# Altium PCB OpenAXES.PcbDoc (part 2 of 2)
Units mm, origin at the board's own origin, x right, y up, seen from the top; angles counter-clockwise.
Board outline 34.5 x 18 mm, 4 copper layers (L1, L2, L3, L4), stack 0.956 mm thick; 99 components, 71 nets, 369 pads, 165 vias.
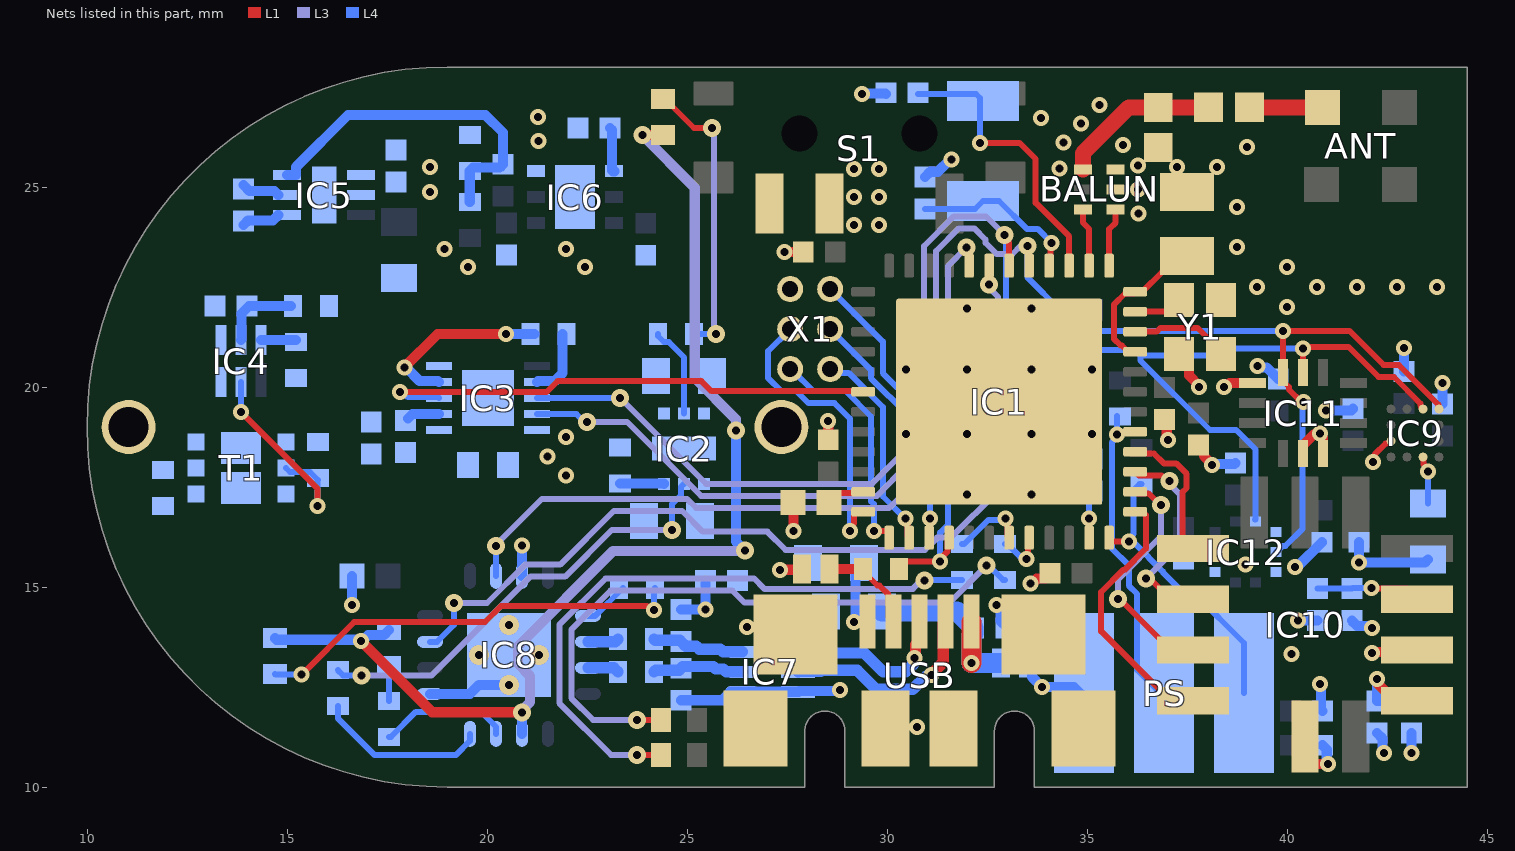
[diagram p4: the nets of this part, all layers, seen from the top]

## Via types
v1: diameter 0.4/0.45/0.4 (per signal layer), hole 0.2, L1 to L4, 143 vias
v2: diameter 0.5, hole 0.2, L1 to L4, 16 vias
v3: diameter 0.4/0.45/0.4 (per signal layer), hole 0.2, L1 to L4, tented both sides, 6 vias

## Nets (pads, with @x,y where several pads share a name; then routed paths per layer and width w, separated by ;. In a path a pad name is that pad's centre, name@x,y a point inside that pad or via, vN(x,y) a via of type N, cw(c..) or ccw(c..) an arc to the next point about the centre after c; other vN are vias at no path point) (continued)
+5V: C12.2 C25.2 C26.2 IC2.4 IC8.10 L2.2 LED3.ANODE LED4.ANODE LED5.ANODE | length 28.7
  L1 w0.254: v1(16.845,13.655) 18.631,11.869 v1(20.875,11.869) ; v1(23.885,26.301) LED3.ANODE@24.375,26.3
  L3 w0.254: v1(20.875,11.869) 20.875,11.922 21.077,12.124 21.077,12.772 20.773,13.076 20.773,13.522 23.155,15.904 26.444,15.904 v1(26.45,15.91) ; v1(23.885,26.301) 23.885,26.292 25.193,24.984 25.193,20.227 26.222,19.198 v1(26.222,18.912)
  L4 w0.254: LED5.ANODE@14.7,13.72 14.737,13.683 16.912,13.683 17.032,13.802 17.427,13.802 LED4.ANODE@17.55,13.925 ; IC8.10@20.875,11.328 v1(20.875,11.869) ; v1(26.222,18.912) 26.222,16.138 v1(26.45,15.91)
AI0_GPIO: IC1.36 PS.3 R23.1 | length 7.3
  L1 w0.15: IC1.36@35.554,16.232 35.554,16.185 35.599,16.14 v1(36.047,16.14)
  L4 w0.15: R23.1@36.366,17.574 36.316,17.574 36.166,17.424 36.166,16.327 36.047,16.208 v1(36.047,16.14) 36.095,16.092 36.189,16.092 36.895,15.386 36.895,15.372 37.443,14.823 37.702,14.823 38.925,13.6 PS.3@38.925,12.35
AI1_GPIO: IC1.41 PS.2 R24.1 | length 8.1
  L1 w0.15: v1(35.754,18.818) 35.787,18.85 36.172,18.85 IC1.41@36.204,18.882
  L4 w0.15: R24.1@35.754,19.271 v1(35.754,18.818) 35.754,18.75 35.622,18.618 35.622,15.964 36.045,15.541 36.045,15.034 36.25,14.829 36.25,12.925 PS.2@36.925,12.25
ALRT: IC1.18 IC3.8 | length 12.8
  L1 w0.15: v1(17.826,19.873) 21.487,19.873 21.765,20.151 25.359,20.151 25.61,19.9 29.387,19.9 IC1.18@29.404,19.882
  L4 w0.15: v1(17.826,19.873) 17.893,19.873 18.019,19.747 18.777,19.747 IC3.8@18.8,19.725
ANT: ANT.ANTENNA L1.2 | length 1.8
  L1 w0.399: L1.2@39.065,26.99 ANT.ANTENNA@40.885,26.99
BAT+: BAT.BAT+ C13.2 C14.2 IC2.3 IC3.10 R12.2 S1.2
  other v1: 29.175,24.05 29.8,24.05 29.175,24.75 29.8,24.75 29.175,25.45 29.8,25.45
BAT-: C12.1 C13.1 C14.1 C15.1 IC2.1 IC2.7 IC3.6 IC3.11 R7.1 R10.1 R11.1 R13.1 T1.1
BCD: IC2.5 R20.2 | length 11.2
  L3 w0.15: v1(16.86,12.79) 18.615,12.79 21.085,15.26 21.953,15.26 23.124,16.431 v1(24.625,16.431)
  L4 w0.15: R20.2@16.27,12.92 16.4,12.79 v1(16.86,12.79) ; v1(24.625,16.431) 24.625,17.073 24.85,17.299 24.85,17.502 IC2.5@24.925,17.577
D_N: C27.2 IC7.5 R19.1 | length 2.3
  L4 w0.284: R19.1@24.175,12.878 24.22,12.923 24.805,12.923 C27.2@24.85,12.968 24.896,13.014 25.654,13.014 25.72,12.949 25.911,12.949 25.977,12.883 26.377,12.883 IC7.5@26.38,12.88
D_P: C28.2 IC7.6 R21.1 | length 2.3
  L4 w0.284: R21.1@24.175,13.698 24.205,13.668 24.82,13.668 C28.2@24.85,13.638 24.968,13.52 25.231,13.52 25.303,13.449 25.834,13.449 25.9,13.383 26.377,13.383 IC7.6@26.38,13.38
GND: BALUN.5 BALUN.6 C1.1 C2.1 C3.1 C4.1 C5.1 C6.1 C7.1 C8.1 C9.1 C10.1 C11.1 C18.1 C19.1 C21.1 C22.1 C23.2 C24.1 C25.1 C26.1 C27.1 C28.1 C29.1 C30.2 C31.2 C32.1 C33.1 C34.2 C35.2 C36.1 C37.2 C38.1 C39.2 C40.1 C41.1 C42.1 C43.1 C44.1 D1.2 D2.2 IC1.49 IC3.5 IC5.4 IC5.7 IC6.3 IC6.7 IC7.3 IC7.4 IC8.3 IC8.13 IC8.17 IC9.11 IC10.6 IC10.9 IC11.1 IC11.6 IC11.7 IC12.3 IC12.5 IC12.8 IC12.9 PS.1 R10.2 R16.1 USB.5 USB.6 USB.7 USB.8 USB.9 USB.10 USB.11 X1.1 Y1.2 Y1.4 | length 34.9
  L1 w0.15: v1(42.15,18.125) 42.198,18.173 42.198,18.322 42.461,18.585 42.516,18.585 42.581,18.65 IC9.11@42.6,18.65
  L1 w0.254: v1(27.32,15.43) 27.86,15.43 D2.2@27.88,15.45 ; v1(27.44,23.375) C1.1@27.905,23.375 ; C10.1@27.65,17.11 27.66,17.1 v1(27.66,16.404) ; C2.1@28.53,18.682 v1(28.53,19.15) ; v1(33.584,15.089) 33.624,15.089 33.743,15.209 33.945,15.209 C3.1@34.078,15.342 ; C5.1@36.935,19.185 36.992,19.128 36.992,18.698 v1(37.02,18.67) ; Y1.2@37.3,20.825 37.548,20.577 37.548,20.291 37.8,20.04 v1(37.8,20) ; C4.1@37.79,18.55 37.923,18.417 37.923,18.272 38.13,18.065 v1(38.13,18.05) ; v1(38.425,20) 38.465,20 38.563,20.098 IC11.1@39.137,20.1 IC11.1@39.137,20.1 ; IC11.6@40.4,18.338 40.4,18.546 40.661,18.807 40.792,18.807 v1(40.82,18.835) 40.82,18.795 40.898,18.717 40.898,18.34 IC11.7@40.9,18.338 ; IC10.6@40.45,11.26 40.45,10.791 40.663,10.578 v1(41.022,10.578) ; v1(42.12,13.35) 42.148,13.378 43.203,13.378 IC10.9@43.25,13.425
  L4 w0.254: v1(16.625,14.55) C29.1@16.625,15.278 ; IC8.13@18.575,12.328 19.575,12.328 19.8,12.553 v2(20.55,12.553) ; IC8.3@20.875,15.278 v1@20.875,16.025 ; C27.1@24.85,12.168 25.881,12.168 26.093,12.38 IC7.3@27.78,12.38 27.803,12.403 28.797,12.403 v1(28.82,12.425) ; C28.1@24.85,14.438 v1(25.458,14.438) C26.1@25.458,15.16 ; v1(29.18,14.13) 29.208,14.158 29.208,15.333 C25.1@29.42,15.545 ; v1(29.375,27.325) 29.39,27.34 29.96,27.34 C8.1@29.975,27.325 ; C7.1@30.95,25.25 31.083,25.383 31.27,25.383 31.577,25.69 v1(31.617,25.69) ; v1(32.74,14.55) 32.74,14.51 32.833,14.417 32.833,14.158 C24.1@33.016,13.975 ; D1.2@33.53,13.103 33.628,13.005 33.628,12.747 v1(33.875,12.5) 34.675,12.5 PS.1@34.925,12.25 ; C6.1@35.054,18.2 35.092,18.237 35.092,18.791 v2(35.129,18.829) ; v1(38.13,18.05) 38.155,18.075 38.69,18.075 C43.1@38.715,18.1 ; v1(39.26,20.52) 39.288,20.492 39.488,20.492 C41.1@39.78,20.2 ; v1(40.2,15.5) 40.228,15.528 40.283,15.528 C39.2@40.875,16.12 ; v1(40.28,14.16) C35.2@40.765,14.16 ; v1(40.82,12.57) 40.848,12.542 40.848,11.94 C38.1@40.888,11.9 ; C37.2@40.888,11.045 40.994,10.938 40.994,10.606 v1(41.022,10.578) ; v1(40.979,19.417) 41.612,19.417 C42.1@41.65,19.455 ; C36.1@41.622,14.16 41.755,14.027 42.033,14.027 42.08,13.98 v1(42.12,13.98) ; C40.1@41.8,16.12 v1(41.8,15.61) 43.442,15.61 C32.1@43.522,15.69 ; C33.1@42.25,11.35 42.383,11.217 42.383,10.937 42.43,10.89 v1(42.43,10.85) ; C31.2@42.925,20.388 v1(42.925,20.975) ; v1(43.11,10.85) C34.2@43.11,11.35 ; C30.2@43.89,19.575 v1(43.89,20.1)
  other v1: 30.75,11.5 40.11,13.33 26.5,14 38.965,15.569 20.875,16.035 21.975,17.784 21.515,18.267 21.975,18.75 40,22 39.25,22.5 40.75,22.5 41.75,22.5 42.75,22.5 43.75,22.5 19.525,22.996 22.45,22.996 40,23 18.94,23.45 21.975,23.45 38.75,23.5 36.29,24.344 38.75,24.5 36.272,24.944 37.25,25.5 38.25,25.5 36.272,25.544 39,26 21.29,26.15 21.28,26.75
  other v2: 19.8,13.303 21.3,13.303 20.55,14.053 32.001,17.307 33.608,17.307 30.479,18.829 32.001,18.829 33.608,18.829 30.479,20.436 32.001,20.436 33.608,20.436 35.129,20.436 32.001,21.957 33.608,21.957
  other v3: 34.313,25.46 35.897,26.049 34.407,26.107 34.851,26.588 33.846,26.721 35.313,27.05
I2C_SCL: IC1.6 IC3.3 IC9.3 IC11.13 IC12.2 R2.1 | length 39.7
  L1 w0.15: v1(32.94,23.8) 32.94,23.732 33.054,23.618 IC1.6@33.054,23.032 ; IC11.13@40.4,20.363 v1(40.4,20.964) 40.436,21 41.543,21 42.293,20.25 42.674,20.25 43.335,19.589 43.335,19.534 43.4,19.469 IC9.3@43.4,19.45
  L3 w0.15: v1(23.326,19.726) 25.477,17.575 29.619,17.575 30.398,18.354 30.676,18.354 30.954,18.632 30.954,20.816 30.926,20.844 30.926,23.525 31.666,24.265 32.475,24.265 v1(32.94,23.8)
  L4 w0.15: IC3.3@21.25,19.725 v1@23.326,19.725 ; v1(32.94,23.8) 32.977,23.763 32.977,21.157 R2.1@32.94,21.12 32.94,21.07 33.09,20.92 36.205,20.92 36.335,20.79 ; IC12.2@39.2,16.688 39.215,16.688 39.215,18.438 38.728,18.925 38.074,18.925 36.335,20.664 36.335,20.79 ; v1(40.4,20.964) 38.406,20.964 38.232,20.79 36.335,20.79
I2C_SDA: IC1.5 IC3.4 IC9.4 IC11.14 IC12.4 R3.1 | length 38.4
  L1 w0.15: v1(33.518,23.528) 33.536,23.51 33.536,23.05 IC1.5@33.554,23.032 ; v1(40.418,19.63) 40.351,19.63 40.05,19.932 40.05,20 39.9,20.15 IC11.14@39.9,20.363 v1(39.9,21.4) 41.567,21.4 42.417,20.55 42.798,20.55 43.787,19.561 43.787,19.463 IC9.4@43.8,19.45
  L3 w0.15: v1(22.5,19.125) 23.503,19.125 25.353,17.275 29.744,17.275 30.522,18.054 30.8,18.054 31.254,18.508 31.254,20.94 31.226,20.968 31.226,23.401 31.79,23.965 32.184,23.965 32.463,23.685 32.463,23.605 32.743,23.325 33.137,23.325 33.34,23.528 v1(33.518,23.528)
  L4 w0.15: IC3.4@21.25,19.325 22.232,19.325 22.432,19.125 v1(22.5,19.125) ; v1(33.518,23.528) 33.518,22.732 34.325,21.925 34.325,21.825 34.75,21.4 v1(39.9,21.4) ; IC12.4@39.728,15.875 39.74,15.875 39.89,16.025 39.958,16.025 40.39,16.457 40.39,19.602 v1(40.418,19.63)
JTAG_TCKC: IC1.25 X1.3 | length 5.9
  L1 w0.15: v1(29.669,16.404) 30.009,16.404 30.054,16.359 IC1.25@30.054,16.232
  L4 w0.15: X1.3@27.58,20.422 27.635,20.422 28.157,19.9 28.964,19.9 29.6,19.264 29.6,17.139 29.669,17.07 v1@29.669,16.405 ; v1@29.668,16.404 v1@29.669,16.405
JTAG_TDI: IC1.27 X1.5 | length 6.3
  L1 w0.15: IC1.27@31.054,16.232 31.064,16.242 31.064,16.704 v1@31.061,16.707
  L4 w0.15: X1.5@28.59,21.422 28.608,21.422 29.596,20.434 29.596,20.224 30.515,19.304 30.676,19.304 31.074,18.905 31.074,16.72 v1@31.061,16.707
  other v1: 31.074,16.707
JTAG_TDO: IC1.26 X1.6 | length 5.2
  L1 w0.15: v1(30.456,16.707) 30.456,16.639 30.509,16.586 30.509,16.277 IC1.26@30.554,16.232
  L4 w0.15: X1.6@28.59,20.422 28.658,20.354 29.041,20.354 29.9,19.495 29.9,17.263 v1(30.456,16.707)
JTAG_TMSC: IC1.24 X1.2 | length 7.2
  L1 w0.15: 29.179,16.582 29.179,16.837 29.224,16.882 IC1.24@29.404,16.882
  L4 w0.15: X1.2@27.58,21.422 27.552,21.422 27.03,20.9 27.03,20.222 27.352,19.9 27.733,19.9 28.033,19.6 28.681,19.6 29.069,19.212 v1(29.069,16.404)
NetBAT_BAT-: BAT.BAT- C16.1 IC4.4 R14.1 T1.4
NetC7_2: C7.2 IC1.4 Y2.1 | length 4.3
  L1 w0.15: IC1.4@34.054,23.032 34.086,23.064 34.086,23.569 v1(34.118,23.601)
  L4 w0.15: C7.2@30.95,24.45 32.2,24.45 Y2.1@32.4,24.65 32.8,24.65 33.497,23.953 33.766,23.953 v1(34.118,23.601)
NetC8_2: C8.2 IC1.3 Y2.2 | length 7.3
  L1 w0.15: v1(32.325,26.1) 33.318,26.1 33.716,25.702 33.716,24.604 34.554,23.765 IC1.3@34.554,23.032
  L4 w0.15: C8.2@30.775,27.325 32.225,27.325 32.325,27.225 v1(32.325,26.1)
NetC10_2: C10.2 IC1.23 | length 1
  L1 w0.15: C10.2@28.55,17.11 28.785,17.345 29.367,17.345 IC1.23@29.404,17.382
NetC11_2: C11.2 IC1.45 IC1.48 | length 3.8
  L1 w0.15: IC1.45@36.204,20.882 36.024,20.882 35.869,21.037 35.841,21.037 35.679,21.199 35.679,22.066 35.951,22.337 36.159,22.337 IC1.48@36.204,22.382 36.384,22.382 36.877,22.875 37.1,22.875 C11.2@37.5,23.275
NetC15_2: C15.2 IC3.7 | length 0.8
  L4 w0.254: C15.2@18.025,19.212 18.137,19.325 IC3.7@18.8,19.325
NetC16_2: C16.2 IC4.5 R12.1 | length 2
  L4 w0.254: IC4.5@13.85,21.175 13.863,21.188 13.863,21.838 14.05,22.025 R12.1@15.1,22.025
NetC17_1: C17.1 IC5.3 R15.1 R16.2 | length 8.8
  L4 w0.254: IC5.3@15.005,25.3 15.226,25.3 15.228,25.302 15.228,25.505 16.525,26.802 19.96,26.802 20.4,26.362 C17.1@20.4,25.57 20.315,25.485 19.655,25.485 R16.2@19.57,25.4 R15.1@19.57,24.625
NetC19_2: C19.2 IC5.5 S1.3
  other v1: 18.575,24.875 18.575,25.5
NetC20_1: C20.1 IC5.2 | length 1
  L4 w0.254: C20.1@13.91,25.05 14.062,24.898 14.686,24.898 IC5.2@14.782,24.802
NetC20_2: C20.2 IC5.1 | length 1
  L4 w0.254: C20.2@13.91,24.05 14.027,24.167 14.651,24.167 IC5.1@14.782,24.298
NetC23_1: C23.1 IC6.4 | length 1.1
  L4 w0.254: C23.1@23.075,26.475 23.128,26.422 23.128,25.418 23.151,25.395 IC6.4@23.18,25.395
NetC32_2: C32.2 IC9.8 | length 1.2
  L1 w0.15: IC9.8@43.4,18.25 43.413,18.237 43.413,18.058 43.522,17.95 v1(43.522,17.882)
  L4 w0.15: C32.2@43.522,17.09 v1(43.522,17.882)
NetC33_2: C33.2 C34.1 IC10.8 | length 2.7
  L1 w0.254: v1(42.25,12.701) 42.278,12.673 42.278,12.567 42.765,12.08 IC10.8@43.25,12.08
  L4 w0.254: v1(42.25,12.701) C33.2@42.25,12.15 C34.1@43.11,12.15
NetC35_1: C35.1 C36.2 IC10.10 | length 2.6
  L1 w0.15: v1(42.11,14.97) 42.12,14.96 42.985,14.96 IC10.10@43.25,14.695
  L4 w0.15: C35.1@40.765,14.96 C36.2@41.622,14.96 41.632,14.97 v1(42.11,14.97)
NetD2_1: D2.1 R22.1 USB.4 | length 2.5
  L1 w0.15: R22.1@29.4,15.45 29.4,15.4 29.763,15.038 29.809,15.038 30.041,14.806 30.041,14.262 USB.4@30.166,14.138
  L1 w0.254: D2.1@28.56,15.45 R22.1@29.4,15.45
NetIC1_31: IC1.31 R6.1 | length 1.9
  L1 w0.15: v1(32.956,16.707) 32.956,16.64 33.009,16.586 33.009,16.277 IC1.31@33.054,16.232
  L4 w0.15: R6.1@31.88,16.075 31.93,16.075 32.531,16.676 32.926,16.676 v1(32.956,16.707)
NetIC1_32: IC1.32 R5.1 | length 1.2
  L1 w0.15: v1@33.489,15.706 33.519,15.735 33.519,16.197 IC1.32@33.554,16.232
  L4 w0.15: R5.1@32.955,16.075 33.005,16.075 33.326,15.754 33.442,15.754 v1@33.489,15.706
  other v1: 33.483,15.706
NetIC1_46: IC1.46 Y1.3 | length 2.5
  L1 w0.15: IC1.46@36.204,21.382 36.739,21.382 36.832,21.475 37.768,21.475 38.05,21.193 38.05,21.125 Y1.3@38.35,20.825
NetIC1_47: IC1.47 Y1.1 | length 1.2
  L1 w0.15: IC1.47@36.204,21.882 37.007,21.882 Y1.1@37.3,22.175
NetIC2_2: IC2.2 R8.2 | length 2.3
  L4 w0.15: R8.2@24.275,21.325 24.275,21.275 24.425,21.125 24.544,21.125 24.925,20.743 IC2.2@24.925,19.337
NetIC2_6: IC2.6 R7.2 | length 1.1
  L4 w0.254: R7.2@23.326,17.584 24.419,17.584 IC2.6@24.425,17.577
NetIC3_2: IC3.2 R9.1 | length 1.7
  L4 w0.254: IC3.2@21.25,20.125 21.273,20.148 21.69,20.148 21.891,20.349 R9.1@21.891,21.325
NetIC3_9: IC3.9 R9.2 | length 4.6
  L1 w0.254: v1(17.934,20.494) 18.765,21.325 v1(20.475,21.325)
  L4 w0.254: v1(17.934,20.494) 17.974,20.494 18.32,20.148 18.777,20.148 IC3.9@18.8,20.125 ; v1(20.475,21.325) R9.2@21.191,21.325
NetIC4_2: IC4.2 R13.2 T1.2 | length 5.5
  L1 w0.15: v1(13.853,19.371) 15.768,17.456 v1(15.768,17.026)
  L4 w0.15: IC4.2@13.85,20.125 IC4.2@13.85,20.125 13.852,19.372 v1(13.853,19.371) ; T1.2@14.975,17.975 15.075,17.875 15.575,17.875 15.775,17.675 15.768,17.668 v1(15.768,17.026)
NetIC4_3: IC4.3 R14.2 T1.5
NetIC4_6: IC4.6 R11.2 | length 0.9
  L4 w0.254: IC4.6@14.35,21.175 R11.2@15.225,21.175
NetIC8_5: IC8.5 R18.1 | length 1.2
  L4 w0.15: IC8.5@22.525,14.278 22.703,14.278 R18.1@23.4,14.975
NetIC8_11: IC8.11 R17.1 | length 3.3
  L4 w0.15: R17.1@17.55,11.256 17.6,11.256 18.222,11.878 19.85,11.878 20.225,11.503 IC8.11@20.225,11.328
NetIC8_12: IC8.12 R20.1 | length 4.3
  L4 w0.15: R20.1@16.27,12.02 16.27,11.718 17.182,10.806 19.228,10.806 19.575,11.153 IC8.12@19.575,11.328
NetLED1_CATHODE: LED1.CATHODE R5.2 | length 16.1
  L1 w0.15: v1(23.75,11.675) LED1.CATHODE@24.35,11.675
  L3 w0.15: v1(23.75,11.675) 22.655,11.675 22.11,12.22 22.11,13.933 23.09,14.913 26.134,14.913 26.437,14.61 31.561,14.61 v1(32.485,15.534)
  L4 w0.15: v1(32.485,15.534) 32.546,15.534 32.905,15.175 R5.2@32.955,15.175
NetLED2_CATHODE: LED2.CATHODE R6.2 | length 15.8
  L1 w0.15: v1(23.75,10.8) LED2.CATHODE@24.35,10.8
  L3 w0.15: v1(23.75,10.8) 23.106,10.8 21.81,12.096 21.81,14.057 22.966,15.213 26.677,15.213 26.935,14.955 30.646,14.955 30.86,15.169 v1(30.941,15.169)
  L4 w0.15: v1(30.941,15.169) 30.947,15.175 R6.2@31.88,15.175
NetLED3_CATHODE: LED3.CATHODE R8.1 | length 7.2
  L1 w0.15: LED3.CATHODE@24.45,27.2 25.175,26.475 v1(25.625,26.475)
  L3 w0.15: v1(25.625,26.475) 25.675,26.425 25.675,21.375 v1(25.725,21.325)
  L4 w0.15: R8.1@25.175,21.325 v1(25.725,21.325)
NetLED4_CATHODE: LED4.CATHODE R17.2 | length 0.9
  L4 w0.15: R17.2@17.55,12.156 LED4.CATHODE@17.55,13.025
NetLED5_CATHODE: LED5.CATHODE R18.2 | length 10.8
  L1 w0.15: v1(15.365,12.81) 16.68,14.125 19.95,14.125 20.353,14.528 24.004,14.528 24.102,14.43 v1(24.17,14.43)
  L4 w0.15: LED5.CATHODE@14.7,12.82 14.71,12.81 v1(15.365,12.81) ; v1(24.17,14.43) 24.17,14.945 R18.2@24.2,14.975
NetT1_3: T1.3 T1.6
R\E\S\E\T\: C6.2 IC1.35 R1.1 R4.1 X1.4 | length 10.8
  L1 w0.15: IC1.35@35.054,16.232 v1(35.054,16.707)
  L4 w0.15: X1.4@28.58,22.422 28.608,22.422 29.896,21.134 29.896,20.348 30.64,19.604 31.898,19.604 32.476,19.025 32.476,17.994 32.63,17.84 34.253,17.84 R1.1@34.293,17.8 ; R1.1@34.313,17.83 34.493,17.65 34.874,17.65 35.054,17.47 v1(35.054,16.707)
RF_N: BALUN.3 IC1.2 | length 1.5
  L1 w0.15: BALUN.3@34.894,24.444 34.9,24.438 34.9,24.11 35.054,23.95 IC1.2@35.054,23.032
RF_P: BALUN.4 IC1.1 | length 1.5
  L1 w0.15: IC1.1@35.554,23.032 35.554,23.95 35.714,24.11 BALUN.4@35.714,24.444
RXD: IC1.8 IC8.2 | length 20.2
  L1 w0.15: v1(31.987,23.49) 32.021,23.456 32.021,23.066 IC1.8@32.054,23.032
  L3 w0.15: v1(20.225,16.025) 20.225,16.057 21.374,17.206 24.998,17.206 25.229,16.975 30.052,16.975 30.831,17.754 31.598,17.754 32.476,18.632 32.476,20.632 31.526,21.582 31.526,23.029 v1(31.987,23.49)
  L4 w0.15: IC8.2@20.225,15.278 v1(20.225,16.025)
SPI_C\S\: IC1.40 IC10.1 | length 3.6
  L1 w0.15: IC1.40@36.204,18.382 36.249,18.337 36.672,18.337 36.919,18.09 37.231,18.09 37.493,17.827 37.493,17.475 37.385,17.367 37.385,16.155 IC10.1@37.65,15.89
SPI_MISO: IC1.37 IC10.4 | length 6.7
  L1 w0.15: IC1.37@36.204,16.882 36.384,16.882 36.472,16.795 36.472,15.964 35.928,15.42 35.897,15.42 35.353,14.876 35.353,13.892 37.165,12.08 IC10.4@37.65,12.08
SPI_MOSI: IC1.38 IC10.3 | length 6
  L1 w0.15: v1(35.778,14.7) 35.815,14.7 37.165,13.35 IC10.3@37.65,13.35 ; IC1.38@36.204,17.382 36.249,17.337 36.54,17.337 36.826,17.051 v1(36.855,17.051)
  L3 w0.15: v1(35.778,14.7) 35.778,15.199 36.855,16.276 v1(36.855,17.051)
SPI_SCLK: IC1.39 IC10.2 | length 5.3
  L1 w0.15: IC1.39@36.204,17.882 36.297,17.79 36.862,17.79 37.001,17.651 v1(37.068,17.651) ; v1(36.47,15.21) 36.518,15.162 36.623,15.162 37.165,14.62 IC10.2@37.65,14.62
  L3 w0.15: v1(36.47,15.21) 37.33,16.07 37.33,17.308 37.068,17.57 v1(37.068,17.651)
TXD: IC1.7 IC8.15 | length 22.6
  L1 w0.15: v1(32.552,22.557) v1(32.552,22.557) 32.553,23.031 IC1.7@32.554,23.032
  L3 w0.15: v1(19.175,14.6) 20.001,14.6 20.961,15.56 21.829,15.56 23.175,16.906 24.873,16.906 25.394,16.385 27.007,16.385 27.463,15.929 30.948,15.929 31.251,16.232 31.597,16.232 32.776,17.41 32.776,22.252 32.552,22.476 v1(32.552,22.557)
  L4 w0.15: IC8.15@18.575,13.628 18.75,13.628 19.175,14.053 v1(19.175,14.6)
UNBALANCED: BALUN.1 C9.2 L1.1 | length 4
  L1 w0.399: BALUN.1@34.894,25.444 34.896,25.445 34.896,25.841 36.048,26.993 36.776,26.993 C9.2@36.779,26.99 L1.1@38.035,26.99
USB_D_N: IC7.2 USB.2 | length 5.2
  L1 w0.281: v1(31.114,12.796) 31.114,12.828 31.407,13.12 31.407,14.078 USB.2@31.466,14.138
  L4 w0.284: IC7.2@27.78,12.88 27.788,12.888 28.342,12.888 28.371,12.917 29.252,12.917 29.725,12.444 30.645,12.444 30.975,12.774 31.092,12.774 v1(31.114,12.796)
USB_D_P: IC7.1 USB.3 | length 4.3
  L1 w0.281: v1(30.69,13.22) 30.713,13.243 30.713,13.559 30.816,13.662 USB.3@30.816,14.138
  L4 w0.284: IC7.1@27.78,13.38 27.788,13.372 28.276,13.372 28.296,13.352 29.431,13.352 29.905,12.878 30.466,12.878 30.668,13.081 30.668,13.198 v1(30.69,13.22)
USB_GPIO_INT: IC1.28 R4.2 R22.2 | length 4.3
  L1 w0.15: R22.2@30.3,15.45 30.3,15.485 30.45,15.635 v1(31.326,15.635) 31.326,15.703 31.509,15.886 31.509,16.187 IC1.28@31.554,16.232
  L4 w0.15: v1(31.326,15.635) 31.326,16.357 31.526,16.557 31.526,18.036 R4.2@31.53,18.04
USB_V+: C24.2 D1.1 L2.1 USB.1 | length 5.1
  L1 w0.5: v1(32.116,13.103) USB.1@32.116,14.131
  L4 w0.5: L2.1@29.88,14.39 31.751,14.39 C24.2@32.166,13.975 ; C24.2@32.156,13.975 32.156,13.843 32.116,13.803 v1(32.116,13.103) D1.1@32.85,13.103
USBD_N: IC8.7 R19.2 | length 0.8
  L4 w0.284: IC8.7@22.525,12.978 23.175,12.978 R19.2@23.275,12.878
USBD_P: IC8.6 R21.2 | length 0.8
  L4 w0.284: IC8.6@22.525,13.628 23.205,13.628 R21.2@23.275,13.698
pads on no net: "ANT.SOLDER PAD" BALUN.2 IC1.9 IC1.10 IC1.11 IC1.12 IC1.14 IC1.15 IC1.16 IC1.17 IC1.19 IC1.20 IC1.21 IC1.29 IC1.30 IC1.33 IC1.42 IC1.43 IC3.1 IC4.1 IC8.4 IC8.8 IC8.14 IC8.16 IC9.1 IC9.2 IC9.5 IC9.7 IC9.9 IC9.10 IC10.7 IC10.12 IC10.13 IC10.14 IC11.2 IC11.3 IC11.4 IC11.9 IC11.10 IC11.11 IC12.7 S1.1 S1.MOUNT

## Polygon pours and split planes (outlines as drawn)
+3V3 on L3 "+3V3_L03_P056" (solid, remove dead copper, pour order 56): 19.091,10.35 21.875,10.35 21.875,16.67 34.02,16.67 34.02,27.65 18.975,27.65 ccw(c18.93,19.084) 10.364,19.077 ccw(c19.006,18.992)
+3V3 on L3 "+3V3_L03_P046" (solid, remove dead copper, pour order 46): 37.989,21.62 44.15,21.62 44.15,10.35 35.6,10.35 35.6,14.856 34.725,14.856 34.725,16.925 35.525,16.925 35.525,18.76 30.1,18.76 30.1,17.575 19.9,17.575 19.9,14.1 19,14.1 19,27.65 34.02,27.65 34.02,25.589
GND on L3 "GND_L03_P060" (solid, remove dead copper, pour order 60): 22.141,10.35 27.8,10.35 29.1,10.35 32.454,10.35 33.879,10.35 35.25,10.35 35.25,15 22.141,15
BAT+ on L4 "BAT+_L04_P026" (solid, remove dead copper, pour order 26): 16.425,18.817 16.425,20.7 15.825,20.7 15.825,22.65 26.575,22.65 26.575,25.875 30.225,25.875 30.225,23.725 27.54,23.725 27.54,20.65 26.275,20.65 26.275,21.75 20.45,21.75 19.125,20.425 17.55,20.425 17.55,18.817
NetIC4_3 on L4 "NETIC4_3_L04_P028" (solid, remove dead copper, pour order 28): 12.95,18.275 12.375,18.275 12.375,18.925 13.183,19.733 13.5,19.734 13.5,20.525 13.213,20.525 11.575,18.887 11.575,17.675 12.95,17.675
GND on L4 "GND_L04_P003" (solid, remove dead copper, pour order 3): 21,26.98 22.799,26.98 22.799,23.643 24.225,23.643 24.225,22.812 21.605,22.812 21.605,25.249 21,25.25 21,25.55
+3V3 on L4 "+3V3_L04_P058" (solid, remove dead copper, pour order 58): 36.65,17.075 36.65,22.96 36.03,23.58 29.026,23.58 29.026,17.075
GND on L4 "GND_L04_P032" (solid, remove dead copper, pour order 32): 19.825,25.975 19.825,26.425 15.65,26.425 15.65,22.779 16.941,22.779 17.35,22.37 18.25,22.37 18.659,22.779 22.797,22.779 22.797,23.62 16.25,23.62 16.25,25.175 17.225,25.175 17.225,25.65 18.1,25.65 18.1,25.975
NetBAT_BAT- on L4 "NETBAT_BAT-_L04_P030" (solid, remove dead copper, pour order 30): 12.95,17.544 12.95,16.675 11.375,16.675 10.35,17.7 10.35,19.85 12.85,22.35 13.475,22.35 13.475,20.8 13.213,20.8 11.525,19.112 11.525,17.544
BAT- on L4 "BAT-_L04_P022" (solid, remove dead copper, pour order 22): 20.1,18.45 20.675,19.025 20.675,19.85 19.375,19.85 19.375,19.225 19.175,19.025 18.475,19.025 18.475,18.625 16.1,18.625 16.1,20.45 14.75,20.45 14.75,18.4 15.45,18.4 15.45,17.385 16.25,17.385 16.25,17.175 20.1,17.175
GND on L4 "GND_L04_P054" (solid, pour order 54): 37.15,16 38.35,16 38.35,16.5 39.87,16.5 39.87,15.255 37.15,15.25
+5V on L4 "+5V_L04_P014" (solid, remove dead copper, pour order 14): 24.975,17.1 25.275,17.1 25.275,17.72 28.83,17.72 28.83,13.94 27.065,13.94 26.155,14.85 24.975,14.85
BAT+ on L4 "BAT+_L04_P008" (solid, remove dead copper, pour order 8): 25.275,20.875 27.39,20.875 27.39,18.817 25.275,18.817
BAT- on L4 "BAT-_L04_P006" (solid, pour order 6): 22.425,20.625 22.425,17.275 16.25,17.275 16.25,16.45 21.3,16.45 21.54,16.21 24.275,16.21 24.275,17.109 22.875,17.109 22.875,18.159 23.76,18.159 25.726,18.159 25.726,18.76 24.633,18.76 24.576,18.817 24.576,19.119 24.576,19.625 24.576,20.625
+3V6 on L4 "+3V6_L04_P034" (solid, remove dead copper, pour order 34): 16.525,24.47 16.525,23.77 21.459,23.77 21.459,25.075 20.119,25.075 20.119,24.47
NetT1_3 on L4 "NETT1_3_L04_P018" (solid, remove dead copper, pour order 18): 13.35,18.875 14.35,18.875 14.35,17.55 15.2,17.55 15.2,17.075 13.35,17.075 13.35,18.4 12.5,18.4 12.5,18.875
NetC19_2 on L4 "NETC19_2_L04_P040" (solid, remove dead copper, pour order 40): 16.62,24.634 16.62,24.932 17.32,24.932 17.445,25.057 17.445,25.402 18.37,25.402 18.37,25.7 18.775,25.7 18.775,24.63
+3V3 on L4 "+3V3_L04_P038" (solid, remove dead copper, pour order 38): 22.955,24.9 26.425,24.9 26.425,22.782 24.376,22.775 24.376,23.825 22.955,23.825
GND on L4 "GND_L04_P020" (solid, remove dead copper, pour order 20): 20.25,17.425 22.25,17.425 22.25,19.025 20.9,19.025 20.25,18.375
GND on L1 "L1-GND" (solid, remove dead copper, pour order 102): 154 vertices, not listed, extent 33.202,22.851 38.444,28.664
BAT+ on L1 "BAT+_L01_P044" (solid, remove dead copper, pour order 44): 30.225,23.725 30.225,25.875 27.996,25.875 27.996,23.725
NetC19_2 on L1 "NETC19_2_L01_P036" (solid, remove dead copper, pour order 36): 27.41,23.84 18.27,23.84 18.27,25.7 27.41,25.692
GND on L1 "GND_L01_P048" (solid, pour order 48): 44.15,23.625 39.425,23.625 39.425,26.25 37.139,26.25 37.139,26.505 35.28,26.505 35.28,22.775 37.975,22.775 37.975,21.75 44.15,21.75
GND on L1 "GND_L01_P010" (solid, remove dead copper, pour order 10): 25.9,10.35 27.79,10.35 29.1,10.35 32.532,10.35 33.84,10.35 35.775,10.35 35.775,14.825 34.975,14.825 32.223,14.825 30.046,14.825 26.65,14.825 25.9,14.825
GND on L2 (split plane): 19,27.648 44.148,27.648 44.148,10.352 34.038,10.352 34.038,11.4 34.031,11.511 34.009,11.62 33.973,11.726 33.924,11.826 33.862,11.919 33.789,12.002 33.705,12.076 33.612,12.138 33.512,12.187 33.407,12.223 33.297,12.245 33.186,12.252 33.075,12.245 32.966,12.223 32.86,12.187 32.76,12.138 32.668,12.076 32.584,12.002 32.51,11.919 32.448,11.826 32.399,11.726 32.363,11.62 32.342,11.511 32.334,11.4 32.335,11.4 32.335,10.352 29.298,10.352 29.298,11.4 29.291,11.511 29.269,11.62 29.233,11.726 29.184,11.826 29.122,11.919 29.049,12.002 28.965,12.076 28.872,12.138 28.772,12.187 28.667,12.223 28.557,12.245 28.446,12.252 28.335,12.245 28.226,12.223 28.12,12.187 28.02,12.138 27.928,12.076 27.844,12.002 27.77,11.919 27.708,11.826 27.659,11.726 27.623,11.62 27.602,11.511 27.594,11.4 27.595,11.4 27.595,10.352 19,10.352 18.988,10.351 18.601,10.359 18.202,10.387 17.805,10.433 17.411,10.498 17.02,10.58 16.633,10.68 16.251,10.799 15.875,10.934 15.506,11.087 15.144,11.257 14.791,11.443 14.446,11.646 14.112,11.864 13.787,12.097 13.474,12.345 13.173,12.608 12.884,12.884 12.608,13.173 12.345,13.474 12.097,13.787 11.864,14.112 11.646,14.446 11.443,14.791 11.257,15.144 11.087,15.506 10.934,15.875 10.799,16.251 10.68,16.633 10.58,17.02 10.498,17.411 10.433,17.805 10.387,18.202 10.359,18.601 10.35,19 10.359,19.399 10.387,19.798 10.433,20.195 10.498,20.589 10.58,20.98 10.68,21.367 10.799,21.749 10.934,22.125 11.087,22.494 11.257,22.856 11.443,23.209 11.646,23.554 11.864,23.888 12.097,24.213 12.345,24.526 12.608,24.827 12.884,25.116 13.173,25.392 13.474,25.655 13.787,25.903 14.112,26.136 14.446,26.354 14.791,26.557 15.144,26.743 15.506,26.913 15.875,27.066 16.251,27.201 16.633,27.32 17.02,27.42 17.411,27.502 17.805,27.567 18.202,27.613 18.601,27.641 18.988,27.649

## Other copper
L1:
  pour cut-out: 35.23,24.68 35.276,24.569 35.276,24.319 35.23,24.208 35.119,24.162 34.669,24.162 34.559,24.208 34.513,24.319 34.513,24.569 34.559,24.68 34.669,24.726 35.119,24.726
  pour cut-out: 36.791,27.347 36.806,27.35 36.884,27.335 36.91,27.317 36.941,27.311 37.007,27.267 37.024,27.241 37.05,27.224 37.094,27.158 37.1,27.127 37.117,27.101 37.133,27.024 37.127,26.993 37.133,26.962 37.117,26.885 37.1,26.859 37.094,26.828 37.05,26.762 37.024,26.745 37.007,26.719 36.941,26.675 36.91,26.669 36.884,26.651 36.806,26.636 36.791,26.639 36.776,26.633 36.197,26.633 35.256,25.692 35.256,25.618 35.276,25.569 35.276,25.319 35.23,25.208 35.119,25.162 35.114,25.162 35.059,25.125 35.029,25.119 35.003,25.102 34.925,25.086 34.894,25.093 34.864,25.086 34.786,25.102 34.76,25.119 34.729,25.125 34.675,25.162 34.669,25.162 34.559,25.208 34.513,25.319 34.513,25.569 34.536,25.624 34.536,25.841 34.542,25.856 34.539,25.871 34.554,25.949 34.571,25.975 34.577,26.006 34.622,26.072 34.635,26.081 34.641,26.095 35.793,27.248 35.808,27.254 35.817,27.267 35.883,27.311 35.914,27.317 35.94,27.335 36.017,27.35 36.033,27.347 36.048,27.353 36.776,27.353
L2 (plane layer: these items are gaps in the copper):
  pour cut-out: 29.08,22.434 29.08,20.439 cw(c28.564,20.439) 28.564,19.923 27.597,19.923 cw(c27.597,20.44) 27.08,20.44 27.08,21.43 cw(c27.583,21.43) 27.583,21.933 ccw(c27.583,22.43) 28.08,22.43 cw(c28.582,22.43) 28.582,22.932 cw(c28.582,22.434)
  pour cut-out: 30.2,25.447 30.2,24.05 cw(c29.8,24.05) 29.8,23.65 29.173,23.65 cw(c29.173,24.048) 28.775,24.048 28.775,25.447 cw(c29.178,25.447) 29.178,25.85 29.797,25.85 cw(c29.797,25.447)
  pour cut-out: 18.475,25.9 19.165,25.9 cw(c19.165,25.49) 19.575,25.49 19.575,24.875 cw(c19.175,24.875) 19.175,24.475 18.475,24.475 cw(c18.475,24.875) 18.075,24.875 18.075,25.5 cw(c18.475,25.5)
  lines w0.7: 19,28 ccw(c19,19) 19,10 24.816,10 27.946,10 27.946,11.4 cw(c28.446,11.4) 28.446,11.9 cw(c28.446,11.4) 28.946,11.4 ; 19,28 19,28 ; 19,28 44.5,28 44.5,10 33.686,10 33.686,11.4 ccw(c33.186,11.4) 33.186,11.9 ; 28.946,11.4 28.946,10 32.686,10 32.686,11.4 ; 28.946,11.4 28.946,11.4 ; 32.686,11.4 cw(c33.186,11.4) 33.186,11.9 ; 32.686,11.4 32.686,11.4 ; 33.186,11.9 33.186,11.9

## Silkscreen, mask and mechanical layers (free items; w line width, h text height)
Top Overlay:
  circle w0.254: c36,23.67 r0.01
Bottom Overlay:
  region: 319 vertices and 0 holes, not listed, extent 29.539,10.412 32.093,12.711
  text "OpenAXES" at 44.15,26 h1
  text "v1.0 2023" at 44.15,25.133 h0.5
  text "Stanislawski,Webering" at 44.15,24.1 h0.5
  text "Licensed under CERN-OHL-S-2.0+" at 44.15,23.26 h0.5
  text "github.com/IMS-AS-LUH/OpenAXES" at 44.15,22.2 h0.5
Mechanical 1:
  lines w0.1: 24.816,10 19,10 cw(c19,19) 19,28 44.5,28 44.5,10 36.816,10
Route Tool Path (Mech3):
  lines w1: 28.446,10 28.446,11.4 ; 33.186,10 33.186,11.4
  lines w2.4: 19,8.8 cw(c19,19) 19,29.2 ; 26.36,29.2 32.26,29.2 ; 27.12,8.8 34.52,8.8

## Text inside footprints (layer, text, board x,y; h text height)
BAT: Top Overlay "+" at 27.264,18.254 h1 r270